# EAGLE board Traffic System - Final (EAGLE 7.6.0)

Size 73.58 x 63.39 mm. Coordinates in mm from the lower left corner, seen from the top.
Outline: 0,0 56.82,0 56.82,53.33 0,53.33 0,0
Copper layers (1*16): Top 0.035mm / dielectric 1.5mm / Bottom 0.035mm
Design rules "default": minimum track width 10mil, minimum drill 24mil, track to track 8mil, track to pad 8mil, pad to pad 8mil, via to via 8mil, smd to smd 8mil, copper to edge 40mil, drill to drill 8mil, minimum pad ring 10mil, minimum via ring 8mil, stop-mask expansion 4mil, vias tented up to drill 0mil, thermal gap 10mil

## Footprints (pad centres in the part's own frame; a part is rotated, then mirrored left to right if it is on the bottom)
LED5MM = drill 0.813 octagon: A -1.27,0; K 1.27,0
1X3P-2.54-2.54-11.6-3.0-BLACK-MALE = drill 0.889 pad 1.651 square: 1 0,2.54 | drill 0.889 pad 1.651: 2 0,0; 3 0,-2.54
0207/10 = drill 0.813 octagon: 1 -5.08,0; 2 5.08,0
ARDUINO_UNO = drill 1.016 pad 1.88: 0 63.5,50.8; 1 60.96,50.8; 2 58.42,50.8; 3 55.88,50.8; 3.3V 35.56,2.54; 4 53.34,50.8; 5 50.8,50.8; 5V 38.1,2.54; 6 48.26,50.8; 7 45.72,50.8; 8 41.656,50.8; 9 39.116,50.8; 10 36.576,50.8; 11 34.036,50.8; 12 31.496,50.8; 13 28.956,50.8; A0 50.8,2.54; A1 53.34,2.54; A2 55.88,2.54; A3 58.42,2.54; A4 60.96,2.54; A5 63.5,2.54; AREF 23.876,50.8; GND 26.416,50.8; GND. 43.18,2.54; GND.. 40.64,2.54; I/OREF 30.48,2.54; N/C 27.94,2.54; RESET 33.02,2.54; SCL 18.796,50.8; SDA 21.336,50.8; VIN 45.72,2.54 | hole 3.2: 66.04,7.62; 66.04,35.56; 15.24,50.8; 13.97,2.54
DIL14 = drill 0.813 long: 1 -7.62,-3.81; 2 -5.08,-3.81; 3 -2.54,-3.81; 4 0,-3.81; 5 2.54,-3.81; 6 5.08,-3.81; 7 7.62,-3.81; 8 7.62,3.81; 9 5.08,3.81; 10 2.54,3.81; 11 0,3.81; 12 -2.54,3.81; 13 -5.08,3.81; 14 -7.62,3.81

## Placement (x,y rotation side)
DBUG  [LED5MM]  5,137.08 0 top  (outside the outline)
DBUR  [LED5MM]  5,162.48 0 top  (outside the outline)
DBUY  [LED5MM]  5,149.78 0 top  (outside the outline)
DLRG  [LED5MM]  5,48.18 0 top
DLRR  [LED5MM]  5,22.78 0 top
DLRY  [LED5MM]  5,35.48 0 top
DRLG  [LED5MM]  5,86.28 0 top  (outside the outline)
DRLR  [LED5MM]  5,60.88 0 top
DRLY  [LED5MM]  5,73.58 0 top  (outside the outline)
DTDG  [LED5MM]  5,124.38 0 top  (outside the outline)
DTDR  [LED5MM]  5,98.98 0 top  (outside the outline)
DTDY  [LED5MM]  5,111.68 0 top  (outside the outline)
PINGBUUS  [1X3P-2.54-2.54-11.6-3.0-BLACK-MALE]  5,200.58 0 top  (outside the outline)
PINGLRUS  [1X3P-2.54-2.54-11.6-3.0-BLACK-MALE]  5,175.18 0 top  (outside the outline)
PINGRLUS  [1X3P-2.54-2.54-11.6-3.0-BLACK-MALE]  5,187.88 0 top  (outside the outline)
PINGTDUS  [1X3P-2.54-2.54-11.6-3.0-BLACK-MALE]  5,213.28 0 top  (outside the outline)
R1  1k‎Ω  [0207/10]  5,238.68 0 top  (outside the outline)
R2  1k‎Ω  [0207/10]  5,251.38 0 top  (outside the outline)
R3  1k‎Ω  [0207/10]  5,264.08 0 top  (outside the outline)
R4  1k‎Ω  [0207/10]  5,276.78 0 top  (outside the outline)
R5  1k‎Ω  [0207/10]  5,289.48 0 top  (outside the outline)
R6  1k‎Ω  [0207/10]  5,302.18 0 top  (outside the outline)
R7  1k‎Ω  [0207/10]  5,314.88 0 top  (outside the outline)
R8  1k‎Ω  [0207/10]  5,327.58 0 top  (outside the outline)
R9  1k‎Ω  [0207/10]  5,340.28 0 top  (outside the outline)
R10  1k‎Ω  [0207/10]  5,352.98 0 top  (outside the outline)
R11  1k‎Ω  [0207/10]  5,365.68 0 top  (outside the outline)
R12  1k‎Ω  [0207/10]  5,378.38 0 top  (outside the outline)
U1  [ARDUINO_UNO]  5,10.08 0 top
U2  [DIL14]  5,225.98 0 top  (outside the outline)

## Library data of the parts
DBUG DBUR DBUY DLRG DLRR DLRY DRLG DRLR DRLY DTDG DTDR DTDY PINGBUUS PINGLRUS PINGRLUS PINGTDUS R1-R12 U1 U2 = AUTODESK_CIRCUITS_BREADBOARD

## Nets
N$1: PINGBUUS.2 PINGLRUS.2 PINGRLUS.2 PINGTDUS.2 U1.5V U2.14
N$2: PINGBUUS.1 PINGLRUS.1 PINGRLUS.1 PINGTDUS.1 U1.GND.
N$3: DLRG.K R3.2
N$4: DLRR.K R1.2
N$5: DBUY.K R5.2
N$6: DBUG.K R6.2
N$7: DRLR.K R7.2
N$8: DRLY.K R8.2
N$9: DRLG.K R9.2
N$10: DTDR.K R10.2
N$11: DLRR.A U1.6 U2.2
N$12: PINGBUUS.3 U1.2
N$13: PINGRLUS.3 U1.3
N$14: PINGTDUS.3 U1.4
N$15: DBUG.A U1.9 U2.6
N$16: PINGLRUS.3 U1.5
N$17: R1.1 R2.1 R3.1 R4.1 R5.1 R6.1 R7.1 R8.1 R9.1 R10.1 R11.1 R12.1 U1.GND U2.7
N$18: DTDY.A U2.13
N$19: DBUY.A U2.4
N$20: DRLY.A U2.10
N$21: DLRG.A U1.7 U2.3
N$22: DBUR.A U1.8 U2.5
N$23: DTDG.A U1.11 U2.11
N$24: DTDR.A U1.10 U2.12
N$25: DRLR.A U1.12 U2.9
N$26: DRLG.A U1.13 U2.8
N$27: DLRY.A U2.1
N$28: DLRY.K R2.2
N$29: DTDY.K R11.2
N$30: DTDG.K R12.2
N$31: DBUR.K R4.2

## Tracks (layer width: path | path; a pad name or v marks a point on that pad's centre or on a via)
N$1  (5 unrouted)
N$2  (4 unrouted)
N$3  (1 unrouted)
N$4  (1 unrouted)
N$5  (1 unrouted)
N$6  (1 unrouted)
N$7  (1 unrouted)
N$8  (1 unrouted)
N$9  (1 unrouted)
N$10  (1 unrouted)
N$11  (2 unrouted)
N$12  (1 unrouted)
N$13  (1 unrouted)
N$14  (1 unrouted)
N$15  (2 unrouted)
N$16  (1 unrouted)
N$17  (13 unrouted)
N$18  (1 unrouted)
N$19  (1 unrouted)
N$20  (1 unrouted)
N$21  (2 unrouted)
N$22  (2 unrouted)
N$23  (2 unrouted)
N$24  (2 unrouted)
N$25  (2 unrouted)
N$26  (2 unrouted)
N$27  (1 unrouted)
N$28  (1 unrouted)
N$29  (1 unrouted)
N$30  (1 unrouted)
N$31  (1 unrouted)